# Altium PCB Main.PcbDoc
Units mm, origin at the board's own origin, x right, y up, seen from the top; angles counter-clockwise.
Board outline 27 x 41 mm, 2 copper layers (Top Layer, Bottom Layer); 16 components, 20 nets, 75 pads, 98 vias.
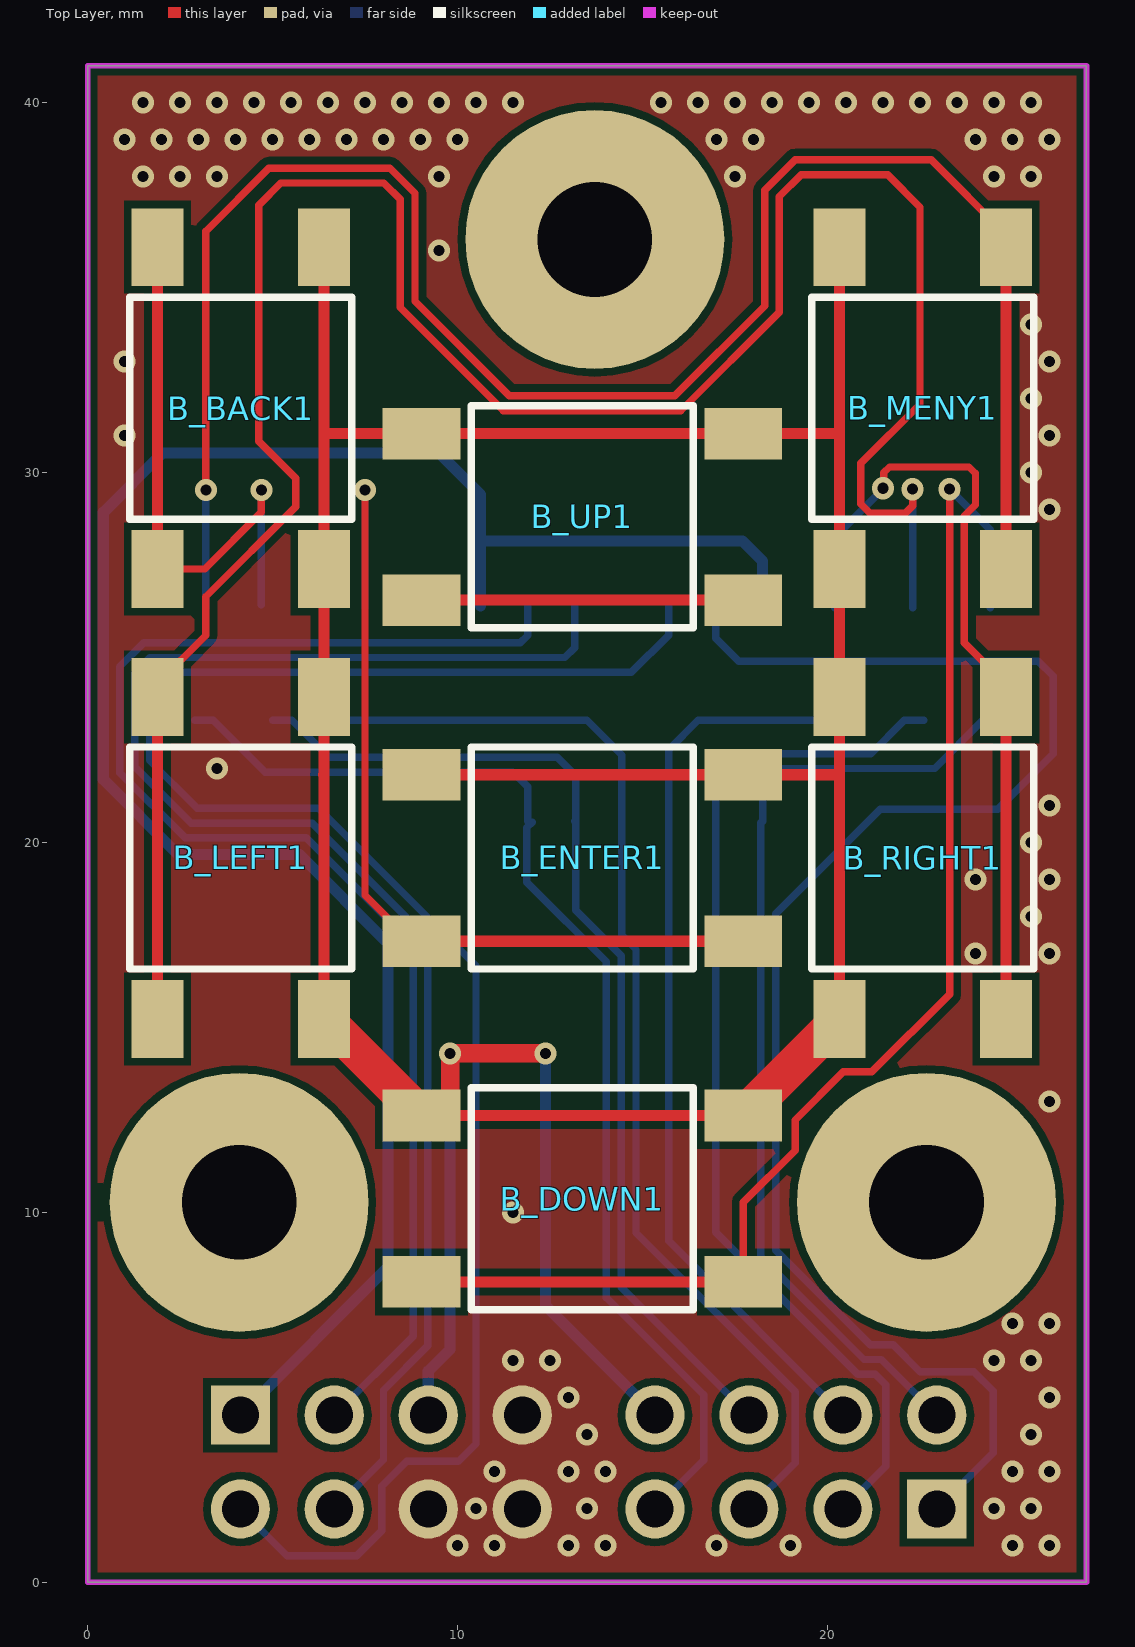
[diagram p0: Top Layer view]
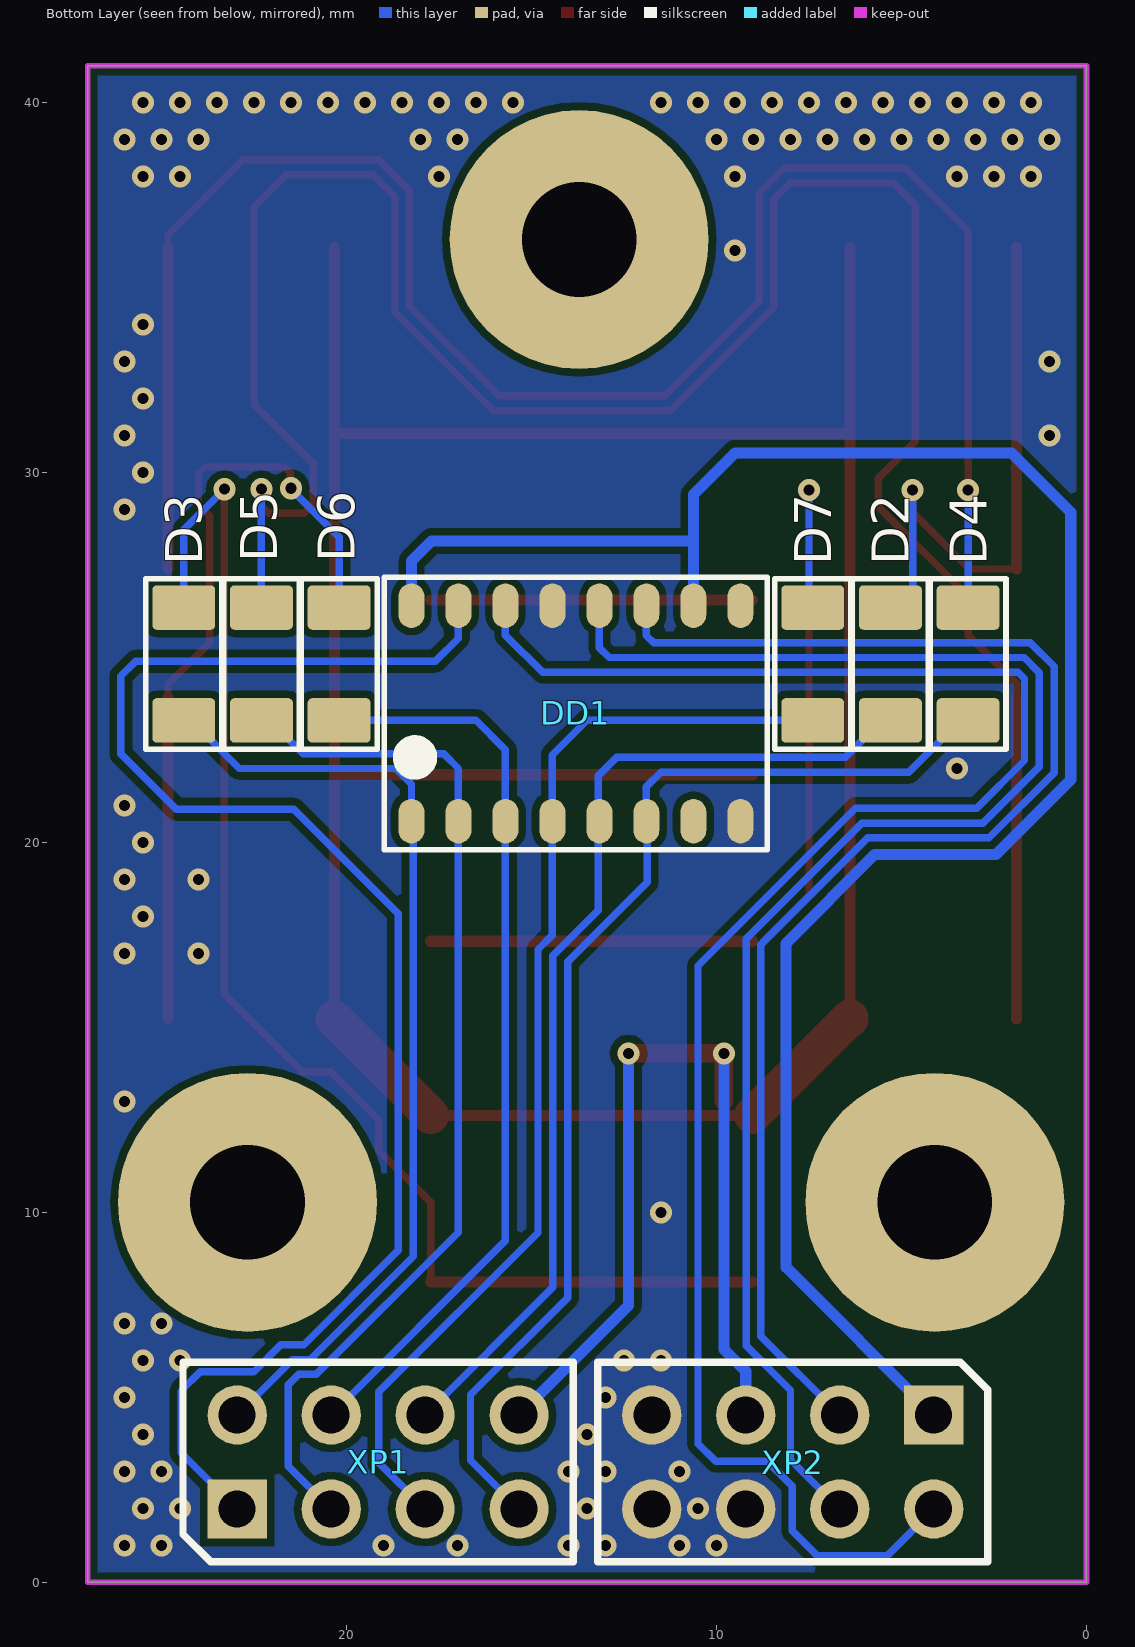
[diagram p1: Bottom Layer view, seen from below]
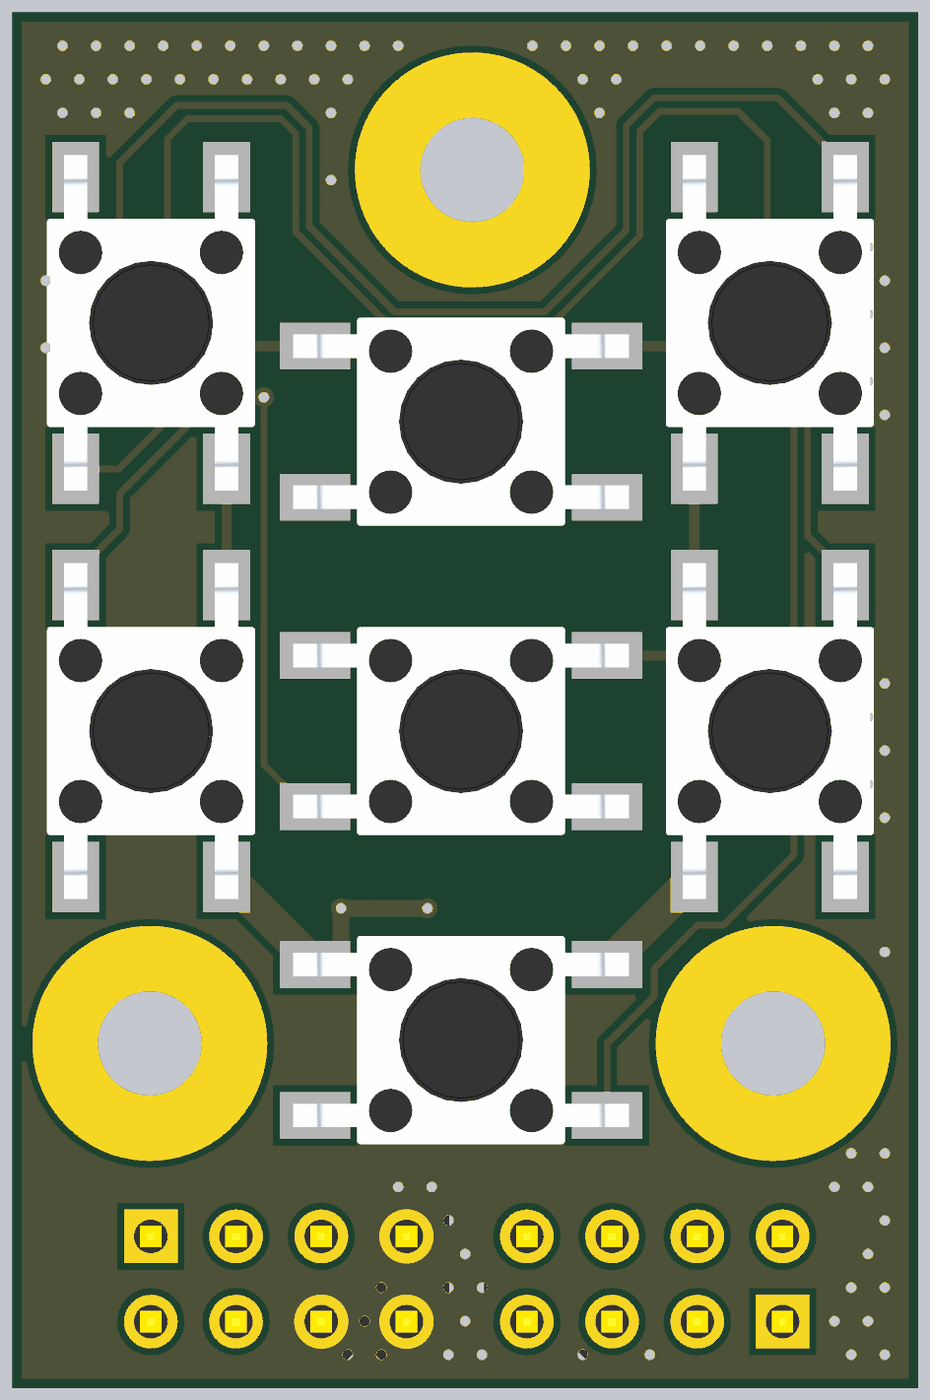
[diagram p2: 3D render of the assembled board from above, using the file's embedded part models]
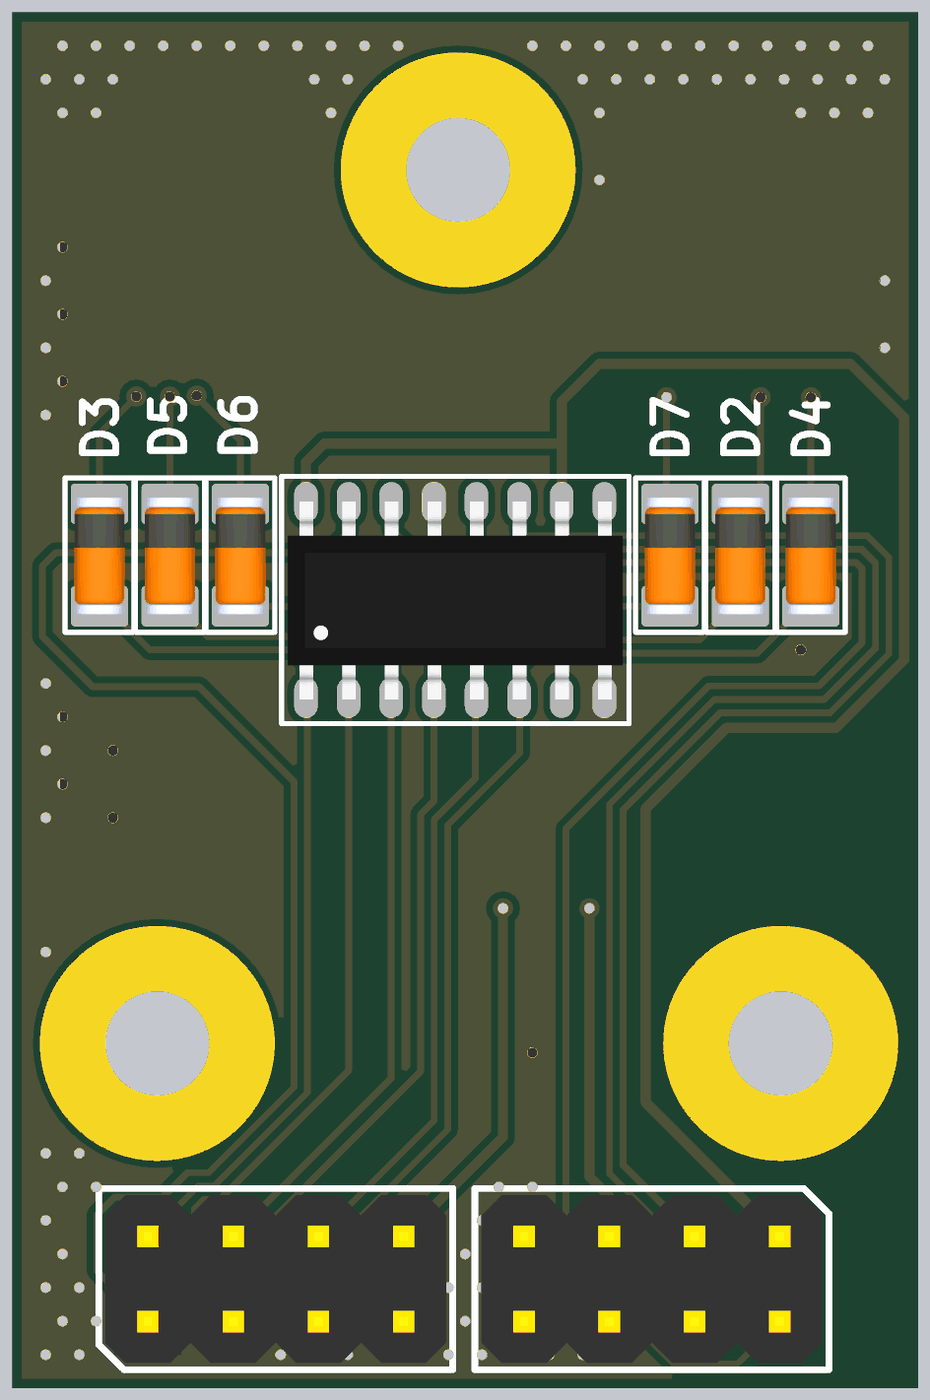
[diagram p3: 3D render of the assembled board from below, using the file's embedded part models]

## Layer stack, top to bottom
Top Solder: solder mask 0.0102, Solder Resist, Dk 3.5
Top Layer: signal copper 0.0356
Dielectric 1: dielectric 0.32, FR-4, Dk 4.8
Bottom Layer: signal copper 0.0356
Bottom Solder: solder mask 0.0102, Solder Resist, Dk 3.5

## Board outline
0,0 0,41 27,41 27,0

## Design rules (kind name [scope] priority, off if disabled: settings)
Clearance [All] p1: gap=0.2
PlaneConnect [All] p1: planeconnectstyle=Direct reliefexpansion=0.15 reliefentries=4 reliefconductorwidth=0.15 reliefairgap=0.15
PolygonConnect [All] p1: connectstyle=Direct reliefconductorwidth=0.15 reliefentries=4 polygonreliefangle="90 Angle" airgapwidth=0.15
RoutingVias [All] p1: holewidth=0.3 width=0.6 viastyle="Through Hole" minholewidth=0.3 minwidth=0.6 maxholewidth=0.3 maxwidth=0.6
SolderMaskExpansion [All] p1: expansion=0.008
Width [All] p1: maxlimit=1 minlimit=0.15 preferedwidth=0.3
29 further rules are at their usual default settings.

## Classes and differential pairs
component class main: B_BACK1 B_DOWN1 B_ENTER1 B_LEFT1 B_MENY1 B_RIGHT1 D2 D3 D4 D5 D6 D7 DD1 XP1 XP2

## Components (designator, comment, footprint, x,y, rotation, side; value= is the part's Value field where it differs from the comment)
B_BACK1 "Tact_switch" Tact_switch_6x6x5 4.138,31.742 r90 top
B_DOWN1 "Tact_switch" Tact_switch_6x6x5 13.375,10.375 r180 top
B_ENTER1 "Tact_switch" Tact_switch_6x6x5 13.375,19.582 r180 top
B_LEFT1 "Tact_switch" Tact_switch_6x6x5 4.138,19.582 r90 top
B_MENY1 "Tact_switch" Tact_switch_6x6x5 22.576,31.742 r270 top
B_RIGHT1 "Tact_switch" Tact_switch_6x6x5 22.576,19.582 r270 top
B_UP1 "Tact_switch" Tact_switch_6x6x5 13.375,28.8 r180 top
D2 "DL4148" DL-35 5.3,24.8 r90 bottom
D3 "DL4148" DL-35 24.4,24.8 r90 bottom
D4 "DL4148" DL-35 3.2,24.8 r90 bottom
D5 "DL4148" DL-35 22.3,24.8 r90 bottom
D6 "DL4148" DL-35 20.2,24.8 r90 bottom
D7 "DL4148" DL-35 7.4,24.8 r90 bottom
DD1 "74HC595N" SO16 13.8,23.5 r90 bottom
XP1 "PLD-8" PLD-8 19.145,3.255 r180 bottom
XP2 "PLD-8" PLD-8 7.94,3.255 r0 bottom

## Footprints (in the part's own frame and the unit in brackets; to place one, negate y for a bottom-side part, rotate by r counter-clockwise, add the part's x,y. Pads: shape width x height; smd on the part's side, far side on the other; paste and mask are expansions set on the pad)
DL-35 [mm]
  rrect20% 1.2x1.7 smd: A(-1.5,0) C(1.55,0)
  silkscreen extent -2.27,-1.02 2.32,1.02, body extent -1.75,-0.75 1.75,0.75, height 1.55
PLD-8 [mm]
  rect 1.6x1.6 hole 1: 1(-3.81,-1.27)
  round 1.6 hole 1: 2(-3.81,1.27) 3(-1.27,-1.27) 4(-1.27,1.27) 5(1.27,-1.27) 6(1.27,1.27) 7(3.81,-1.27) 8(3.81,1.27)
  silkscreen extent -5.28,-2.7 5.28,2.7, body extent -5.08,-2.5 5.08,2.5, height 8.5
SO16 [mm]
  oval 1.2x0.7 smd: 1(-2.925,4.445) 2(-2.925,3.175) 3(-2.925,1.905) 4(-2.925,0.635) 5(-2.925,-0.635) 6(-2.925,-1.905) 7(-2.925,-3.175) 8(-2.925,-4.445) 9(2.9,-4.445) 10(2.9,-3.175) 11(2.9,-1.905) 12(2.9,-0.635) 13(2.9,0.635) 14(2.9,1.905) 15(2.9,3.175) 16(2.9,4.445)
  silkscreen extent -3.7,-5.18 3.67,5.18, body extent -2.98,-4.99 2.93,4.99, height 1.45
Tact_switch_6x6x5 [mm] "Tact switch"
  rect 2.1x1.4 smd: 1(-4.35,2.25) 1(4.35,2.25) 2(-4.35,-2.25) 2(4.35,-2.25)
  silkscreen extent -3,-3 3,3, body extent -5,-3 5,3, height 5

## Part data
B_BACK1 B_DOWN1 B_ENTER1 B_LEFT1 B_MENY1 B_RIGHT1 B_UP1: "SMD pushbutton"
XP1 XP2: "PLD connector"

## Free pads (board coordinates)
  round 7 hole 3.1: 1(13.711,36.3) 2(4.1,10.275) 3(22.675,10.275)

## Via types
v1: diameter 0.6, hole 0.3, Top Layer to Bottom Layer, tented both sides, 98 vias

## Nets (pads, with @x,y where several pads share a name; then routed paths per layer and width w, separated by ;. In a path a pad name is that pad's centre, name@x,y a point inside that pad or via, vN(x,y) a via of type N, cw(c..) or ccw(c..) an arc to the next point about the centre after c; other vN are vias at no path point)
BACK: D2.A DD1.5 XP1.6 | length 28.1
  Bottom Layer w0.2: D2.A@5,23.3 D2.A 5.525,23.3 6.525,22.3 12.7,22.3 13.2,21.8 DD1.5@13.2,20.61 ; DD1.5 DD1.5@13.2,20.61 ; XP1.6 14.425,7.975 14.425,16.941 13.2,18.166 DD1.5@13.2,20.61
CLK: DD1.11 XP2.3 | length 38.5
  Bottom Layer w0.2: XP2.3 8.8,6.655 8.8,17.236 5.911,20.125 2.636,20.125 0.875,21.886 0.875,24.756 1.519,25.4 11.7,25.4 11.895,25.595 DD1.11
DOWN: D3.A DD1.1 XP1.2 | length 26.5
  Bottom Layer w0.2: XP1.2 21.455,6.025 20.985,6.025 18.2,8.81 18.2,20.53 DD1.1 18.245,21.57 18.675,22 22.9,22 24.2,23.3 D3.A D3.A@24.7,23.3
ENTER: D7.A DD1.4 XP1.5 | length 30.6
  Bottom Layer w0.2: D7.A@7.1,23.3 D7.A 13.5,23.3 14.435,22.365 DD1.4 14.435,17.496 14.825,17.106 14.825,9.45 19.125,5.15 19.125,3.235 XP1.5
GND: DD1.8 DD1.13 XP2.6 XP2.7 XP2.8
  other v1: 10,1 11,1 13,1 14,1 17,1 19,1 25,1 26,1 10.5,2 13.5,2 24.5,2 25.5,2 11,3 13,3 14,3 25,3 26,3 13.5,4 25.5,4 13,5 26,5 11.5,6 12.5,6 24.5,6 25.5,6 25,7 26,7 11.5,10 26,13 24,17 26,17 25.5,18 24,19 26,19 25.5,20 26,21 3.5,22 26,29 25.5,30 1,31 26,31 25.5,32 1,33 26,33 25.5,34 9.5,36 1.5,38 2.5,38 3.5,38 9.5,38 17.5,38 24.5,38 25.5,38 1,39 2,39 3,39 4,39 5,39 6,39 7,39 8,39 9,39 10,39 17,39 18,39 24,39 25,39 26,39 1.5,40 2.5,40 3.5,40 4.5,40 5.5,40 6.5,40 7.5,40 8.5,40 9.5,40 10.5,40 11.5,40 15.5,40 16.5,40 17.5,40 18.5,40 19.5,40 20.5,40 21.5,40 22.5,40 23.5,40 24.5,40 25.5,40
LEFT: D5.A DD1.2 XP1.3 | length 28.8
  Bottom Layer w0.2: XP1.3 21.575,3.145 21.575,5.339 21.289,5.625 20.82,5.625 16.975,9.47 DD1.2 16.975,22 17.375,22.4 21.175,22.4 22.075,23.3 D5.A D5.A@22.6,23.3
MENY: D4.A DD1.6 XP1.7 | length 31.8
  Bottom Layer w0.2: D4.A@2.9,23.3 D4.A 3.4,23.3 4.8,21.9 11.5,21.9 11.895,21.505 DD1.6 ; DD1.6@12.02,20.55 11.875,20.405 11.875,18.925 14.025,16.775 14.025,7.7 16.65,5.075 16.65,3.3 XP1.7
NetB_BACK1_1: B_BACK1.1 D2.C | length 15.8
  Top Layer w0.2: B_BACK1.1@1.888,27.392 3.167,27.392 4.7,28.925 v1(4.7,29.525)
  Top Layer w0.3: B_BACK1.1@1.888,27.392 B_BACK1.1@1.888,36.092
  Bottom Layer w0.2: D2.C@4.7,26.425 v1(4.7,29.525)
NetB_DOWN1_1: B_DOWN1.1 D3.C | length 36.5
  Top Layer w0.2: B_DOWN1.1@17.725,8.125 17.725,10.275 19.125,11.675 19.125,12.5 20.425,13.8 21.2,13.8 23.3,15.9 v1(23.3,29.55)
  Top Layer w0.3: B_DOWN1.1@9.025,8.125 B_DOWN1.1@17.725,8.125
  Bottom Layer w0.2: v1(23.3,29.55) 24.4,28.45 D3.C
NetB_ENTER1_1: B_ENTER1.1 D7.C | length 24.6
  Top Layer w0.2: v1@7.4,29.525 7.5,29.425 7.5,18.575 B_ENTER1.1@8.743,17.332
  Top Layer w0.3: B_ENTER1.1@9.025,17.332 B_ENTER1.1@17.725,17.332
  Bottom Layer w0.2: D7.C@7.5,26.35 v1(7.5,29.525)
NetB_LEFT1_1: B_LEFT1.1 D5.C | length 65.1
  Top Layer w0.2: B_LEFT1.1@1.888,23.932 1.888,24.288 3.2,25.6 3.2,26.65 5.625,29.075 5.625,29.85 4.625,30.85 4.625,37.225 5.225,37.825 8.009,37.825 8.45,37.384 8.45,34.459 11.234,31.675 16.041,31.675 18.7,34.334 18.7,37.459 19.291,38.05 21.625,38.05 22.5,37.175 22.5,31.85 20.9,30.25 20.9,29.15 21.15,28.9 22.1,28.9 22.3,29.1 v1(22.3,29.55)
  Top Layer w0.3: B_LEFT1.1@1.888,15.232 B_LEFT1.1@1.888,23.932
  Bottom Layer w0.2: D5.C v1(22.3,29.55)
NetB_MENY1_1: B_MENY1.1 D4.C | length 51.1
  Top Layer w0.2: v1(3.2,29.525) 3.2,36.525 4.9,38.225 8.175,38.225 8.85,37.55 8.85,34.625 11.4,32.075 15.875,32.075 18.3,34.5 18.3,37.625 19.125,38.45 22.8,38.45 24.826,36.424 B_MENY1.1@24.826,36.092
  Top Layer w0.3: B_MENY1.1@24.826,27.392 B_MENY1.1@24.826,36.092
  Bottom Layer w0.2: D4.C v1(3.2,29.525)
NetB_RIGHT1_1: B_RIGHT1.1 D6.C | length 22.1
  Top Layer w0.2: v1@21.525,29.575 21.525,30 21.675,30.15 23.825,30.15 24,29.975 24,29.125 23.7,28.825 23.7,25.4 24.826,24.274 B_RIGHT1.1@24.826,23.932
  Top Layer w0.3: B_RIGHT1.1@24.826,15.232 B_RIGHT1.1@24.826,23.932
  Bottom Layer w0.2: D6.C 20.2,28.25 v1@21.525,29.575
  other v1: 21.5,29.575
NetB_UP1_1: B_UP1.1 | length 8.7
  Top Layer w0.3: B_UP1.1@9.025,26.55 B_UP1.1@17.725,26.55
OUT: B_BACK1.2 B_DOWN1.2 B_ENTER1.2 B_LEFT1.2 B_MENY1.2 B_RIGHT1.2 B_UP1.2 XP1.8 XP2.5 | length 108
  Top Layer w0.3: 6.375,21.832 6.388,21.832 ; B_LEFT1.2@6.388,15.232 6.388,15.262 6.388,21.832 ; B_BACK1.2@6.388,36.092 6.388,27.392 6.388,21.832 ; 6.413,31.05 9.025,31.05 17.725,31.05 20.301,31.05 ; B_DOWN1.2@9.025,12.625 B_DOWN1.2@17.725,12.625 ; B_ENTER1.2@9.025,21.832 17.725,21.832 20.308,21.832 ; B_RIGHT1.2@20.326,15.232 20.326,23.932 20.326,27.392 B_MENY1.2@20.326,36.092
  Top Layer w0.5: B_DOWN1.2@9.8,13 v1(9.8,14.3) 9.825,14.275 9.85,14.3 v1(12.375,14.3)
  Top Layer w1: B_LEFT1.2@6.388,15.232 B_LEFT1.2@6.418,15.232 ; B_LEFT1.2@6.388,15.262 B_LEFT1.2@6.418,15.232 ; B_DOWN1.2@9.025,12.625 B_LEFT1.2@6.418,15.232 ; B_DOWN1.2@17.725,12.625 B_RIGHT1.2@20.332,15.232
  Bottom Layer w0.3: XP2.5 9.21,5.71 9.8,6.3 v1(9.8,14.3) ; v1(12.375,14.3) 12.375,7.485 XP1.8
RIGHT: D6.A DD1.3 XP1.4 | length 25.1
  Bottom Layer w0.2: XP1.4 15.705,9.235 DD1.3 15.705,22.505 16.5,23.3 D6.A D6.A@20.5,23.3
ST_REG: DD1.12 XP2.4 | length 42.2
  Bottom Layer w0.2: XP2.4 8,3.315 8,5.2 9.2,6.4 9.2,17.402 6.077,20.525 2.802,20.525 1.275,22.052 1.275,24.591 1.684,25 12.9,25 13.165,25.265 DD1.12
TX: DD1.14 XP2.2 | length 50.4
  Bottom Layer w0.2: XP2.2 5.39,0.725 7.275,0.725 7.95,1.4 7.95,2.6 8.625,3.275 10.025,3.275 10.5,3.75 10.5,16.668 6.243,20.925 2.968,20.925 1.675,22.218 1.675,24.425 1.85,24.6 14.7,24.6 15.705,25.605 DD1.14
UP: DD1.15 XP1.1 | length 42.2
  Bottom Layer w0.2: DD1.15 16.975,25.525 17.6,24.9 25.7,24.9 26.1,24.5 26.1,22.4 24.6,20.9 21.425,20.9 18.6,18.075 18.6,8.976 21.151,6.425 21.775,6.425 22.5,5.7 23.95,5.7 24.475,5.175 24.475,3.505 XP1.1
VCC: DD1.10 DD1.16 XP2.1 | length 54.5
  Bottom Layer w0.3: XP2.1 8.125,8.52 8.125,17.275 5.725,19.675 2.45,19.675 0.425,21.7 0.425,28.925 2.025,30.525 9.5,30.525 10.625,29.4 10.625,28.15 ; DD1.10 10.625,28.15 ; DD1.16 18.245,27.605 17.7,28.15 10.625,28.15
pads on no net: DD1.7 DD1.9

## Polygon pours and split planes (outlines as drawn)
GND on Top Layer "GND_L01_P000" (solid, remove dead copper, pour order 0): 0,0 27,0 27,41 0,41
GND on Bottom Layer "GND_L02_P002" (solid, remove dead copper, pour order 2): 27,0 0,0 0,41 27,41

## Keep-outs
Keep-Out Layer:
  the board outline again, w0.15